# EAGLE board Adafruit NeoRGB Stemma (EAGLE 9.6.2)
REV: A
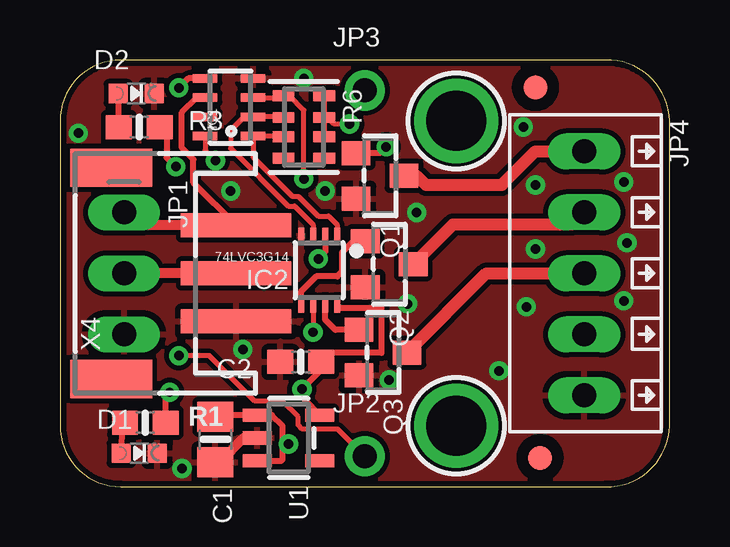
[diagram p0: board, top side]
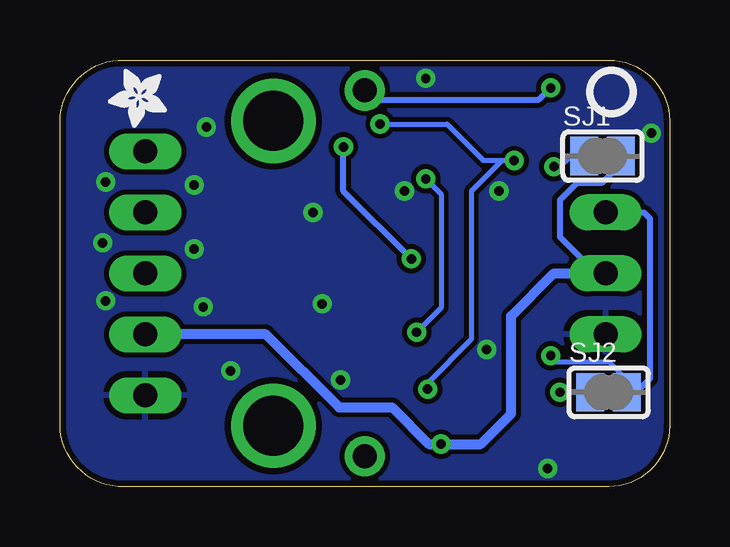
[diagram p1: board, bottom side, seen from below]

Size 25.4 x 17.78 mm. Coordinates in mm from the lower left corner, seen from the top.
Outline: 0,15.24 0,2.54 arc90 2.54,0 22.73,0 arc90 25.4,2.54 25.4,15.24 arc90 22.73,17.78 2.54,17.78 arc90 0,15.24
Copper layers (1*16): Top 0.035mm / dielectric 1.5mm / Bottom 0.035mm
Design rules "adafruit": minimum track width 8mil, minimum drill 15.5mil, track to track 8mil, track to pad 8mil, pad to pad 8mil, via to via 8mil, smd to smd 8mil, copper to edge 10mil, drill to drill 8mil, minimum pad ring 10mil, minimum via ring 8mil, stop-mask expansion 2mil, vias tented up to drill 20mil, thermal gap 10mil
Net classes: 1 HV: width 0.406 mm, drill 0.381 mm, clearance 0.762 mm

## Footprints (pad centres in the part's own frame; a part is rotated, then mirrored left to right if it is on the bottom)
0805-NO = smd 1.24 x 1.5: 1 -0.95,0; 2 0.95,0
0603-NO = smd 1.075 x 1: 1 -0.85,0; 2 0.85,0
CHIPLED_0603_NOOUTLINE = smd 0.8 x 0.8: A 0,-0.75; C 0,0.75
FIDUCIAL_1MM = smd 1 x 1: 1 0,0
FSOP-8 = smd 0.35 x 1.02: 1 -1.2,-1; 2 -0.4,-1; 3 0.4,-1; 4 1.2,-1; 5 1.2,1; 6 0.4,1; 7 -0.4,1; 8 -1.2,1
VFSOP-8 = smd 0.25 x 0.65: 1 -0.75,-1.45; 2 -0.25,-1.45; 3 0.25,-1.45; 4 0.75,-1.45; 5 0.75,1.45; 6 0.25,1.45; 7 -0.25,1.45; 8 -0.75,1.45
1X03_OVAL = drill 1 long: 1 -2.54,0; 2 0,0; 3 2.54,0
1X01_ROUND = drill 1 pad 1.676: 1 0,0
1X05_2.54MMTERMINAL = drill 1 long: 1 5.08,0; 2 2.54,0; 3 0,0; 4 -2.54,0; 5 -5.08,0
SOT23-WIDE = smd 1 x 1.2: 1 -0.95,-1; 2 0.95,-1; 3 0,1
RESPACK_4X0603 = smd 0.45 x 0.9: 1 -1.3,-0.85; 2 -0.4,-0.85; 3 0.4,-0.85; 4 1.3,-0.85; 5 1.3,0.85; 6 0.4,0.85; 7 -0.4,0.85; 8 -1.3,0.85
SOLDERJUMPER_CLOSEDWIRE = smd 1.168 x 1.6: 1 -0.762,0; 2 0.762,0 | smd 0.635 x 0.203: WIRE 0,0
SOT23-5 = smd 0.55 x 1.2: 1 -0.95,-1.3; 2 0,-1.3; 3 0.95,-1.3; 4 0.95,1.3; 5 -0.95,1.3
MOUNTINGHOLE_2.5_PLATED = drill 2.5 pad 3.2: P$1 0,0
JSTPH3 = smd 1 x 4.6: 1 -2,-2.7; 2 0,-2.7; 3 2,-2.7 | smd 1.6 x 3.4: NC1 -4.4,2.5; NC2 4.4,2.5

## Placement (x,y rotation side)
C1  10uF  [0805-NO]  6.48,1.97 270 top
C2  1uF  [0603-NO]  10.03,5.21 180 top
D1  RED  [CHIPLED_0603_NOOUTLINE]  3.3,1.4 270 top
D2  GREEN  [CHIPLED_0603_NOOUTLINE]  3.17,16.38 270 top
E$1  [ADAFRUIT_2.5MM]  20.95,17.4 180 bottom
FID2  FIDUCIAL_1MM  [FIDUCIAL_1MM]  19.81,16.64 0 top
FID3  FIDUCIAL_1MM  [FIDUCIAL_1MM]  20,1.21 0 top
IC1  WS2811F  [FSOP-8]  7.05,15.81 90 top
IC2  74LVC3G14  [VFSOP-8]  10.79,9.02 180 top
JP1  0.1" Header  [1X03_OVAL]  2.67,8.89 270 top
JP2  [1X01_ROUND]  12.7,1.27 0 top
JP3  [1X01_ROUND]  12.7,16.51 0 top
JP4  5P 2.54mm Terminal  [1X05_2.54MMTERMINAL]  21.84,8.89 270 top
PLABEL0  [PLABEL0]  1.78,14.48 90 top
PLABEL1  [PLABEL1]  1.78,1.14 90 top
PLABEL2  [PLABEL2]  21.59,15.88 0 top
PLABEL3  [PLABEL3]  15.49,10.92 0 top
PLABEL4  [PLABEL4]  15.75,8.64 0 top
PLABEL5  [PLABEL5]  15.75,5.97 0 top
PLABEL6  [PLABEL6]  21.34,1.02 0 top
PLABEL7  [PLABEL7]  13.46,9.27 90 bottom
PLABEL8  [PLABEL8]  24.32,13.46 90 bottom
PLABEL9  [PLABEL9]  24.32,10.92 90 bottom
PLABEL10  [PLABEL10]  24.32,8.26 90 bottom
PLABEL11  [PLABEL11]  24.32,4.83 90 bottom
PLABEL12  [PLABEL12]  11.68,16.57 0 bottom
PLABEL13  [PLABEL13]  6.73,9.08 0 bottom
PLABEL14  [PLABEL14]  7.75,6.41 0 bottom
PLABEL15  [PLABEL15]  7.24,11.49 0 bottom
PLABEL16  [PLABEL16]  24,2.1 0 bottom
PLABEL17  [PLABEL17]  11.68,1.21 0 bottom
PLABEL18  [PLABEL18]  3.94,2.1 0 bottom
Q1  AO3406  [SOT23-WIDE]  13.34,12.95 270 top
Q2  AO3406  [SOT23-WIDE]  13.72,9.27 270 top
Q3  AO3406  [SOT23-WIDE]  13.46,5.59 270 top
R1  10K  [0603-NO]  3.56,2.67 0 top
R3  10K  [0603-NO]  3.3,14.99 0 top
R6  4.7K Pack  [RESPACK_4X0603]  10.16,14.99 270 top
SJ1  [SOLDERJUMPER_CLOSEDWIRE]  2.79,13.78 0 bottom
SJ2  [SOLDERJUMPER_CLOSEDWIRE]  2.54,3.94 0 bottom
U1  MIC5225-5.0  [SOT23-5]  9.53,2.03 270 top
U$1  MOUNTINGHOLE2.5  [MOUNTINGHOLE_2.5_PLATED]  16.51,2.54 0 top
U$5  [PCBFEAT-REV-040]  2.41,16.45 0 bottom
U$8  MOUNTINGHOLE2.5  [MOUNTINGHOLE_2.5_PLATED]  16.51,15.24 0 top
X4  JST PH 3  [JSTPH3]  4.64,8.89 90 top

## Library data of the parts
C1 C2 E$1 IC1 IC2 JP1-JP3 R1 R3 R6 SJ1 SJ2 U$5 = microbuilder
D1 D2 Q1-Q3 = microbuilder; ROT: 270
FID2 FID3 = microbuilder; BOM: EXCLUDE
JP4 = microbuilder; FORCETHM: 1
PLABEL0 PLABEL1-PLABEL18 = pinguin
U1 = adafruit_power; JLC_ROTATION: 0
U$1 U$8 = adafruit_electromech; BOM: EXCLUDE
X4 = adafruit_electromech

## Nets
5.0V: C2.1 IC1.8 IC2.8 R6.6 R6.7 R6.8 U1.5
BLUE: JP4.5 Q1.3
DOUT: IC1.5 JP3.1
GND: C1.2 C2.2 D1.C D2.C IC1.4 IC2.4 JP1.3 JP4.1 Q1.2 Q2.2 Q3.2 U1.2 X4.1
GREEN: JP4.4 Q2.3
N$1: R3.2 SJ1.1
N$2: D1.A R1.1
N$3: R1.2 SJ2.1
N$4: IC2.2 Q1.1
N$5: IC2.5 Q2.1
N$6: IC2.7 Q3.1
N$7: IC1.1 IC2.1 R6.3
N$8: IC1.2 IC2.3 R6.2
N$9: IC1.3 IC2.6 R6.1
N$26: D2.A R3.1
RED: JP4.3 Q3.3
SIGNAL: IC1.6 JP1.1 JP2.1 SJ2.2 X4.3
VIN: C1.1 JP1.2 JP4.2 SJ1.2 U1.1 U1.3 X4.2

## Tracks (layer width: path | path; a pad name or v marks a point on that pad's centre or on a via)
5.0V  (via drill 0.39)
  Top 0.203: R6.8 11.01,15.53 | 11.01,15.53 R6.7 R6.6 | v6.48,13.59 6.05,14.02 IC1.8 | v12.06,15.11 11.43,15.11 11.01,15.53
  Top 0.254: IC2.8 11.67,7.44 13.39,7.44 13.39,5.58 11.04,5.58 10.88,5.42 C2.1 10.88,4.87 v10.08,4.06 10.21,3.94 10.21,3.6 U1.5
  Bottom 0.203: v12.06,15.11 9.27,15.11 7.75,13.59 6.99,13.59 | v6.48,13.59 6.99,13.59 | v10.08,4.06 10.08,4.32 8.26,6.14 8.26,12.32 6.99,13.59
BLUE
  Top 0.508: Q1.3 14.86,12.95 15.24,12.57 18.41,12.57 19.81,13.97 JP4.5
DOUT  (via drill 0.39)
  Top 0.254: IC1.5 5.35,17.01 v4.95,16.62
  Bottom 0.254: v4.95,16.62 5.44,16.13 12.68,16.13 JP3.1
GND  (via drill 0.39)
  Top 0.406: U1.2 7.66,2.03 6.65,1.02 C1.2
  other vias: 0.76,14.73 19.81,12.57 19.81,9.91 14.48,7.62 14.86,11.43 11.05,12.32 7.11,12.32 7.62,5.71 5.08,0.76 23.5,12.7 19.3,14.99 23.62,10.16 10.16,17.02 23.5,7.75 19.43,7.49 18.29,4.83 13.72,4.45
  pour Top: 0,17.78 25.4,17.78 25.4,0 0,0
  pour Bottom: 0,17.78 25.4,17.78 25.4,0 0,0
GREEN
  Top 0.508: Q2.3 16.37,10.92 21.34,10.92 JP4.4
N$1  (via drill 0.39)
  Top 0.254: R3.2 4.45,14.95 4.45,13.72 v4.83,13.34
  Bottom 0.254: v4.83,13.34 4.57,13.34 4.13,13.78 SJ1.1
N$2
  Top 0.254: R1.1 2.57,2.54 D1.A
N$3  (via drill 0.39)
  Top 0.254: R1.2 4.41,3.68 4.62,3.89 v4.57,3.94
  Bottom 0.254: SJ2.1 v4.57,3.94
N$4  (via drill 0.39)
  Top 0.254: IC2.2 11.04,9.78 v10.76,9.49 | v13.59,14.16 13.33,13.9 Q1.1
  Bottom 0.254: v10.76,9.49 13.59,12.32 v13.59,14.16
N$5
  Top 0.254: IC2.5 10.04,8.14 10.67,8.76 11.56,8.76 11.75,8.95 11.75,9.75 12.22,10.22 Q2.1
N$6
  Top 0.254: Q3.1 11.47,6.54 11.04,6.97 IC2.7
N$7
  Top 0.203: R6.3 9.28,14.61 IC1.1 8.05,13.73 9.68,12.1 9.94,12.1 10.77,11.27 11.19,11.27 11.54,10.92 IC2.1
N$8
  Top 0.203: R6.2 9.28,15.41 IC1.2 7.67,15.41 7.11,14.86 7.11,14.1 9.51,11.7 9.76,11.7 9.77,11.68 9.78,11.68 10.54,10.92 IC2.3
N$9  (via drill 0.39)
  Top 0.203: IC1.3 9.31,16.21 R6.1 9.56,16.29 10.16,15.69 v10.16,12.83 | IC2.6 v10.54,6.44
  Bottom 0.203: v10.54,6.44 9.53,7.45 9.53,12.19 v10.16,12.83
N$26
  Top 0.254: R3.1 2.45,16.38 D2.A
RED
  Top 0.508: Q3.3 17.76,8.89 JP4.3
SIGNAL  (via drill 0.39)
  Top 0.203: JP2.1 11.57,2.4 10.1,2.4 9.92,2.58 9.92,2.91 9.27,3.56 8.12,3.56 6.22,5.46 v4.95,5.46
  Top 0.254: X4.3 5.56,12.67 5.56,13.64 5.08,14.11 5.08,15.6 5.7,16.21 IC1.6
  Top 0.406: X4.3 3.21,10.89 JP1.1
  Bottom 0.203: v4.95,5.46 4.7,5.21 2.54,5.21 1.78,4.45 SJ2.2
  Bottom 0.254: JP1.1 1.08,11.43 0.83,11.18 0.83,4.51 1.4,3.94 SJ2.2
VIN  (via drill 0.39)
  Top 0.254: C1.1 6.54,2.98 U1.1 8.83,2.98 9.27,2.54 9.27,1.78 | U1.3 9.21,1.08 9.27,1.14 9.27,1.78 | 9.27,1.78 v9.53,1.78
  Top 0.406: X4.2 JP1.2
  Bottom 0.254: SJ1.2 2.15,13.66 2.15,13.34 2.83,12.65 3.86,12.65 4.57,11.94 4.57,10.41 3.05,8.89 JP1.2
  Bottom 0.406: JP4.2 16.82,6.35 13.77,3.3 11.56,3.3 10.03,1.78 v9.53,1.78 7.87,1.78 6.6,3.05 6.6,7.11 4.83,8.89 JP1.2

## Text on the board
Pinguin_tBackup: BLU | ON | GRN | RED | VIN | SIG | GND
Pinguin_bBackup: Neo Out | B | Neo | G | Vin | NeoPixel / to RGB / Com Anode / Vin:3-16V / 3A/channel | R | GND | Vin | LED | GND | Neo In